# Altium PCB MFU 1.00.PcbDoc (part 1 of 2)
Units mm, origin at the board's own origin, x right, y up, seen from the top; angles counter-clockwise.
Board outline 134 x 96 mm, 2 copper layers (Top Layer, Bottom Layer), stack 1.6 mm thick; 195 components, 155 nets, 750 pads, 199 vias.
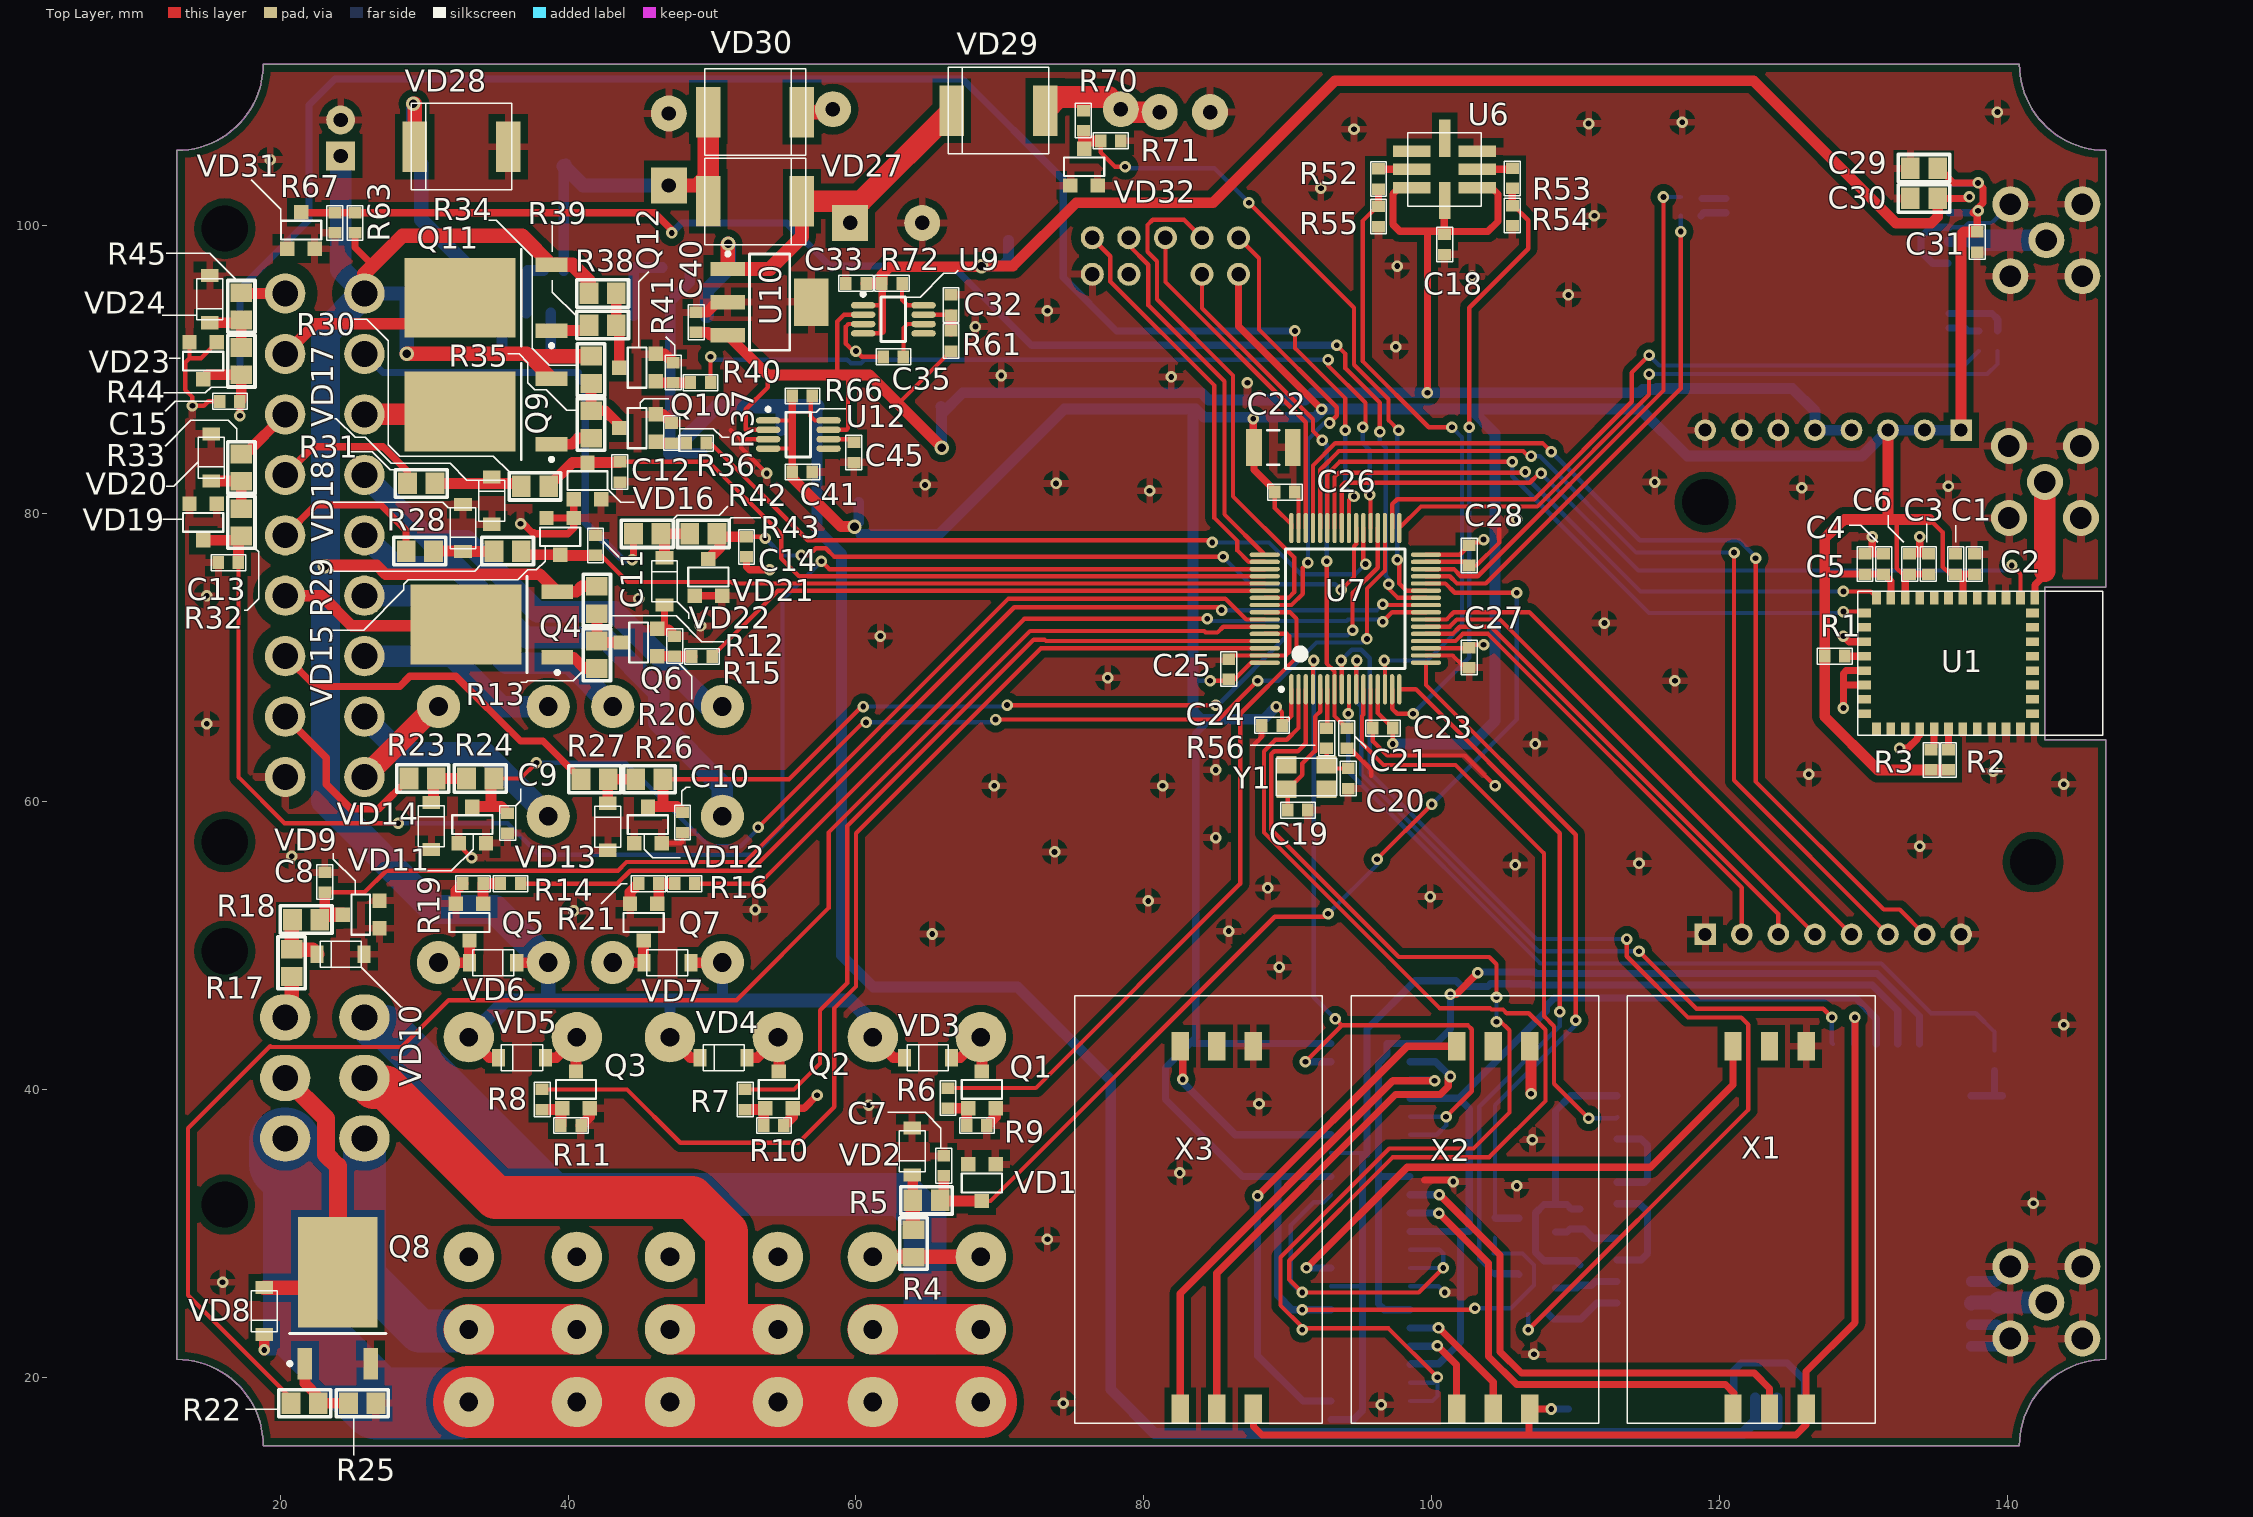
[diagram p0: Top Layer view]
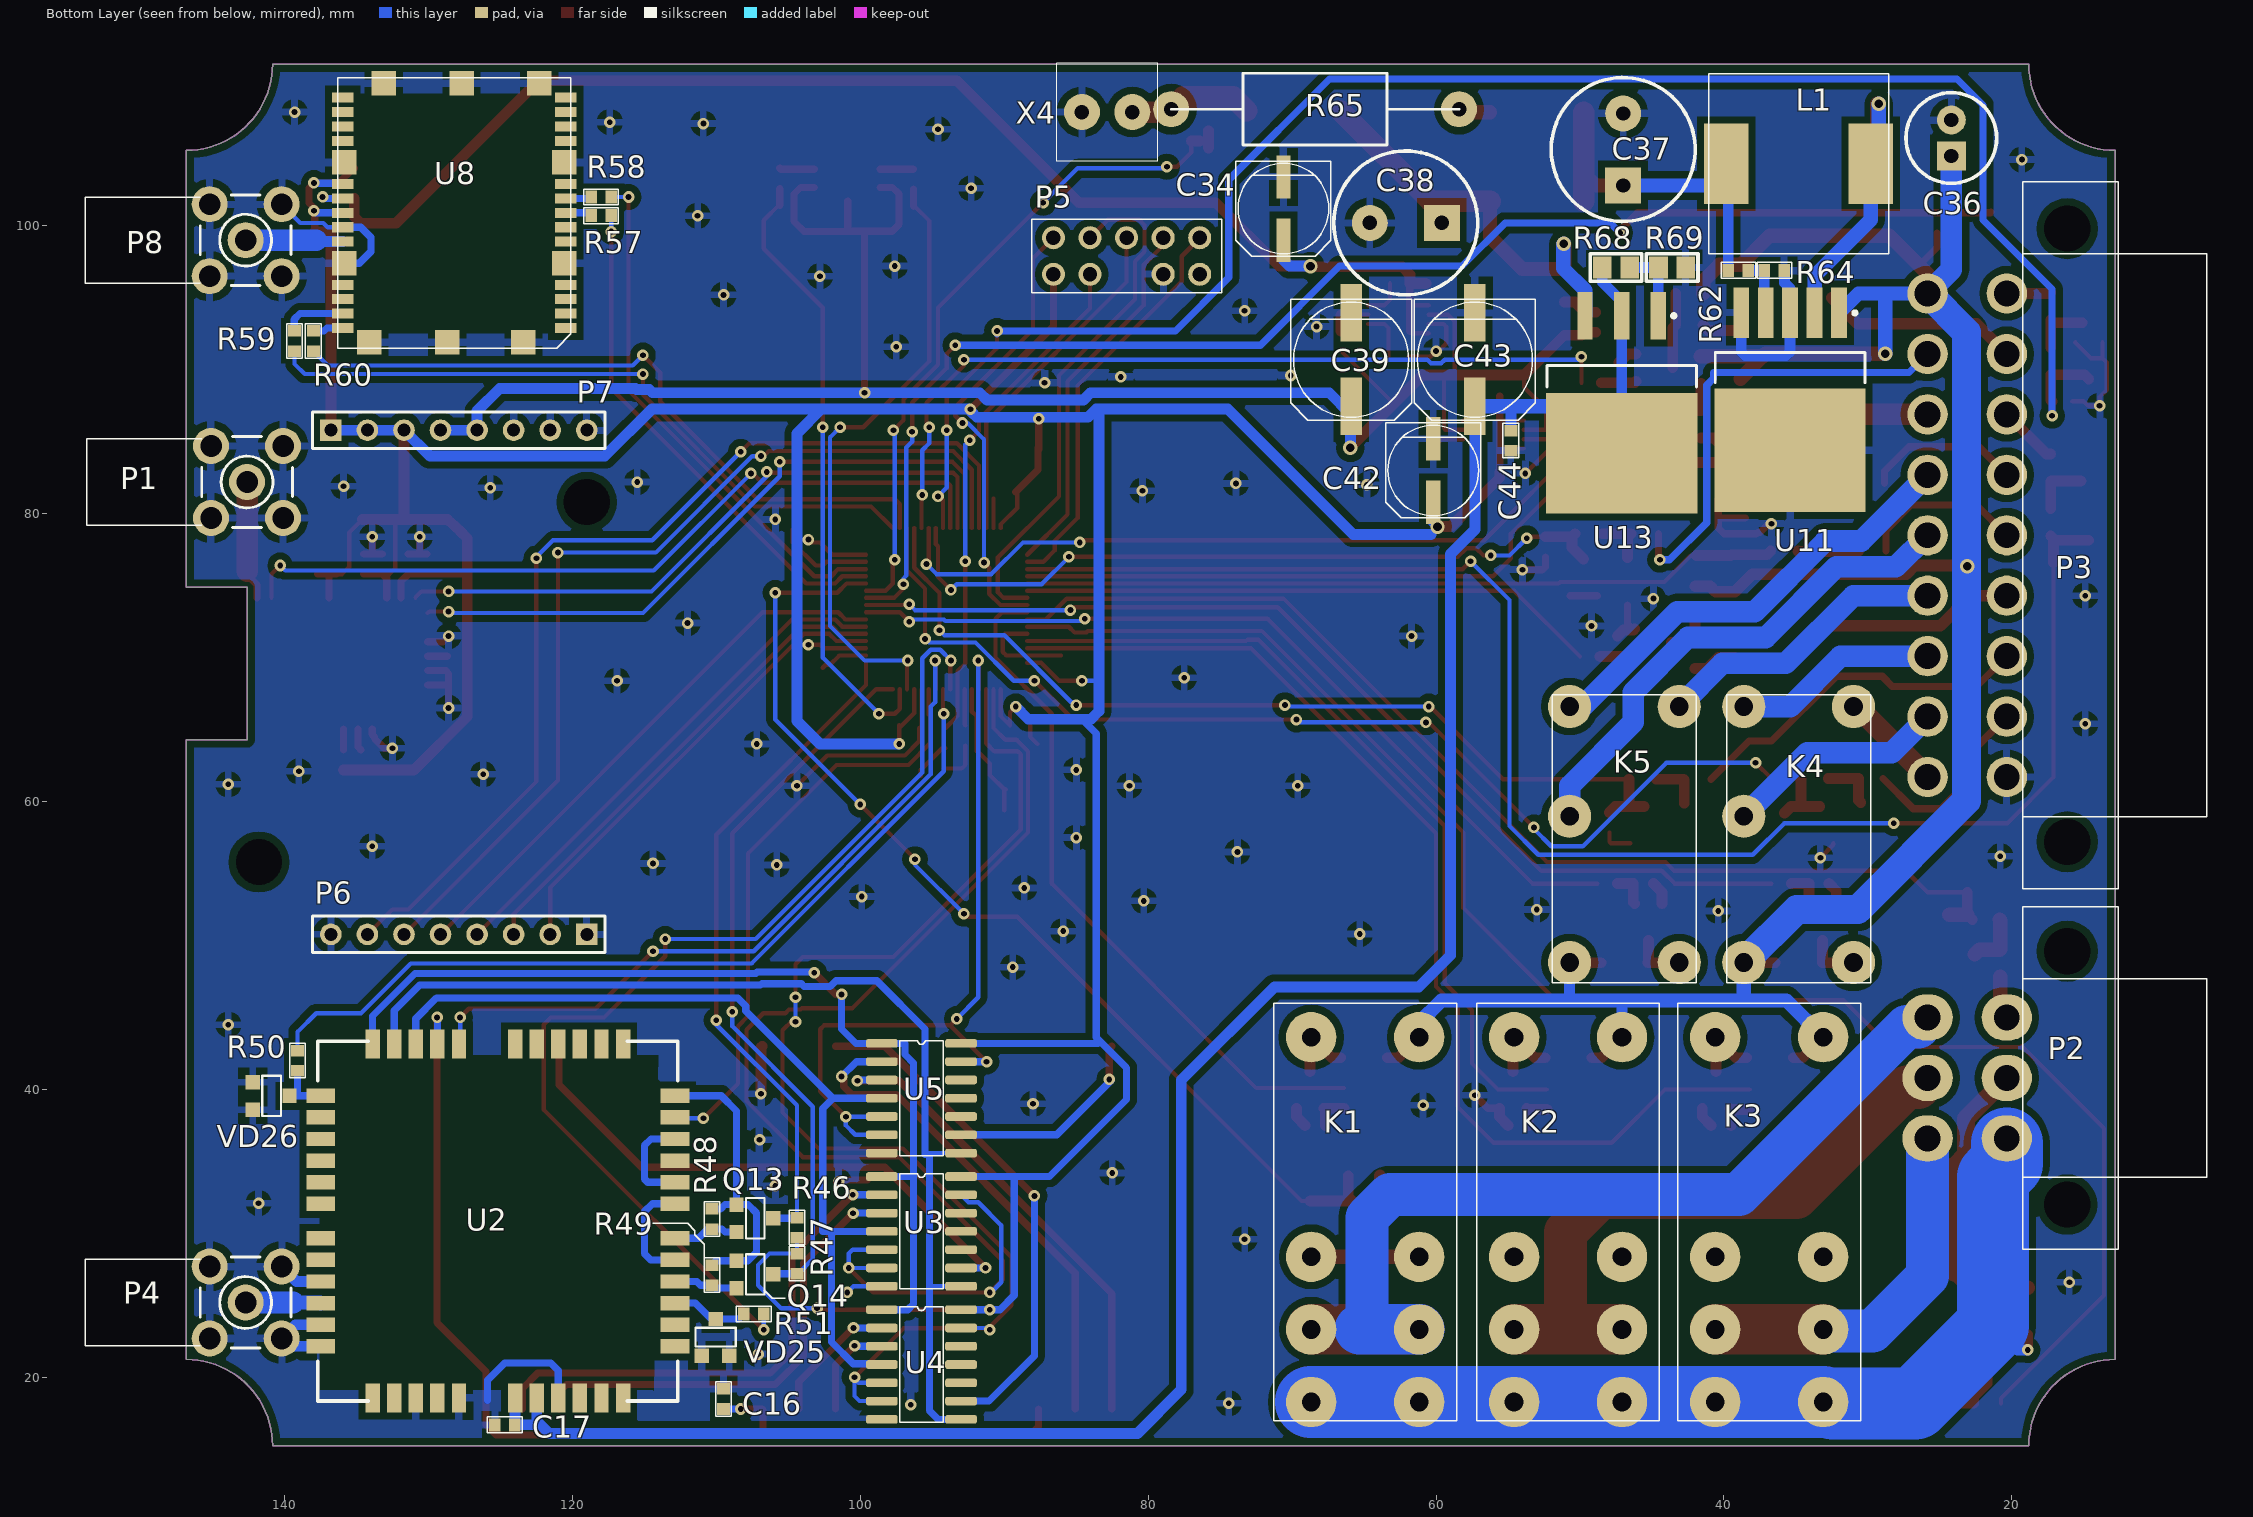
[diagram p1: Bottom Layer view, seen from below]

## Layer stack, top to bottom
Top Layer: signal copper 0.05
Dielectric: core 1.5, FR-4, Dk 4.8
Bottom Layer: signal copper 0.05

## Board outline
12.827,21.24 12.827,105.24 ccw(c12.827,111.24) 18.827,111.24 140.827,111.24 ccw(c146.827,111.24) 146.827,105.24 146.827,74.9 142.6,74.9 142.6,64.3 146.827,64.3 146.827,21.24 ccw(c146.827,15.24) 140.827,15.24 18.827,15.24 ccw(c12.827,15.24)

## Design rules (kind name [scope] priority, off if disabled: settings)
Clearance Clearance_GND [InPolygon] p1: gap=0.5
Clearance Clearance_QFP_NET [InRegion(3140,2260 ,4450 ,3400)] p2: gap=0.2
Clearance Clearance_QFP_Pins [InComponent('U12','U7','U9','U8') And IsPad] p3: gap=0.2
Clearance [All] p4: gap=0.3
ComponentClearance ComponentClearance_R1_C10 [InComponent('C10') vs InComponent('R1')] p1 off: gap=0 collisioncheckmode=3 verticalgap=0 showdistances=FALSE
ComponentClearance [All] p2 off: gap=0.3 collisioncheckmode=3 verticalgap=0.3 showdistances=FALSE
Height [All] p1 off: minheight=0 maxheight=25.4 prefheight=12.7
HoleSize [All] p1: absolutevalues=TRUE maxlimit=5 minlimit=0.3 maxpercent=80.000 minpercent=20.000
MinimumSolderMaskSliver [All] p1: minsoldermaskwidth=0.2
NetAntennae [All] p1: netantennaetolerance=50
PlaneConnect [All] p1: planeconnectstyle=Relief reliefexpansion=0.508 reliefentries=4 reliefconductorwidth=0.3 reliefairgap=0.3
PolygonConnect [All] p1: connectstyle=Relief reliefconductorwidth=0.5 reliefentries=4 polygonreliefangle="90 Angle"
RoomDefinition BLUETOOTH_UNIT [InComponentClass('BLUETOOTH_UNIT')] p1: confinementstyle=ConfineIn formatcopy=TRUE lockcomponents=FALSE outline 126.2,60.3 154.1,60.3 154.1,86.3 126.2,86.3
RoomDefinition GSM_UNIT [InComponentClass('GSM_UNIT')] p2: confinementstyle=ConfineIn formatcopy=TRUE lockcomponents=FALSE outline 74.9,15.3 154.1,15.3 154.1,46.9 74.9,47
RoomDefinition POWER_UNIT [InComponentClass('POWER_UNIT')] p3: confinementstyle=ConfineIn formatcopy=TRUE lockcomponents=FALSE outline 27.6,97.1 27.6,79.1 63.8,79.1 63.8,84.6 70.6,84.6 70.6,96.9 74.4,96.9 74.4,101.1 86.4,101.1 86.4,111.4 19.3,111.4 19.3,97.1
RoomDefinition "CAR ALARM_UNIT" [InComponentClass('CAR ALARM_UNIT')] p4: confinementstyle=ConfineIn formatcopy=TRUE lockcomponents=FALSE outline 5,15.3 71.7,15.3 71.7,47.7 54.3,47.7 54.3,103.5 5,103.5
RoomDefinition NAVIGATION_UNIT [InComponentClass('NAVIGATION_UNIT')] p5: confinementstyle=ConfineIn formatcopy=TRUE lockcomponents=FALSE outline 114.9,89.5 154.4,89.5 154.4,111.1 114.9,111.1
RoomDefinition "MFU 1.00" [InComponentClass('MFU 1.00')] p6: confinementstyle=ConfineIn formatcopy=TRUE lockcomponents=FALSE outline 74.6,49.3 138.3,49.3 138.3,109.9 74.6,109.9
RoutingCorners [All] p1: cornerstyle=45-Degree minsetback=2.54 maxsetback=5
RoutingVias [All] p1: holewidth=0.4 width=0.8 viastyle="Through Hole" minholewidth=0.3 minwidth=0.5 maxholewidth=1 maxwidth=2
ShortCircuit ShortCircuit_ANT1 [InComponent('ANT1')] p1: allowed=TRUE
ShortCircuit [All] p2: allowed=FALSE
SilkToSilkClearance [All] p1: silktosilkclearance=0.3
SilkscreenOverComponentPads [All] p1: minsilkscreentomaskgap=0.2
SolderMaskExpansion [All] p1: expansion=0.102
Width [All] p1: maxlimit=12 minlimit=0.2 preferedwidth=0.3
18 further rules are at their usual default settings.

## Classes and differential pairs
component class POWER_UNIT: C32 C33 C34 C35 C36 C37 C38 C39 C40 C41 C42 C43 C44 C45 L1 R61 R62 R63 R64 R65 R66 R67 R68 R69 R70 R71 R72 U9 U10 U11 U12 U13 VD27 VD28 VD29 VD30 VD31 VD32 X4
component class NAVIGATION_UNIT: C29 C30 C31 P8 R57 R58 R59 R60 U8
component class "MFU 1.00": C18 C19 C20 C21 C22 C23 C24 C25 C26 C27 C28 P5 P6 P7 R52 R53 R54 R55 R56 U6 U7 Y1
component class GSM_UNIT: C16 C17 P4 Q13 Q14 R46 R47 R48 R49 R50 R51 U2 U3 U4 U5 VD25 VD26 X1 X2 X3
component class "CAR ALARM_UNIT": C7 C8 C9 C10 C11 C12 C13 C14 C15 K1 K2 K3 K4 K5 P2 P3 Q1 Q2 Q3 Q4 Q5 Q6 Q7 Q8 Q9 Q10 Q11 Q12 R4 R5 R6 R7 R8 R9 R10 R11 R12 R13 R14 R15 R16 R17 R18 R19 R20 R21 R22 R23 R24 R25 R26 R27 R28 R29 R30 R31 R32 R33 R34 R35 R36 R37 R38 R39 R40 R41 R42 R43 R44 R45 VD1 VD2 VD3 VD4 VD5 VD6 VD7 VD8 VD9 VD10 VD11 VD12 VD13 VD14 VD15 VD16 VD17 VD18 VD19 VD20 VD21 VD22 VD23 VD24
component class BLUETOOTH_UNIT: C1 C2 C3 C4 C5 C6 P1 R1 R2 R3 U1

## Components (designator, comment, footprint, x,y, rotation, side; value= is the part's Value field where it differs from the comment)
C1 "0805" C0603 136.4,76.5 r90 top
C2 "0805" C0603 137.7,76.5 r90 top
C3 "0805" C0603 134.5,76.5 r90 top
C4 "0805" C0603 131.4,76.5 r90 top
C5 "0805" C0603 130.1,76.5 r90 top
C6 "0805" C0603 133.2,76.5 r90 top
C7 "0805" C0603 66.1,34.7 r90 top
C8 "0805" C0603 23.1,54.4 r90 top
C9 "0805" C0603 35.8,58.5 r270 top
C10 "0805" C0603 47.95,58.55 r270 top
C11 "0805" C0603 41.9,77.8 r90 top
C12 "0805" C0603 43.6,82.9 r270 top
C13 "0805" C0603 16.4,76.6 r180 top
C14 "0805" C0603 52.4,77.7 r270 top
C15 "0805" C0603 16.5,87.8 r180 top
C16 "0805" C0603 109.5,18.5 r270 bottom
C17 "0805" C0603 124.7,16.7 r0 bottom
C18 "0805" C0603 100.9,98.7 r90 top
C19 "0805" C0603 90.7,59.4 r0 top
C20 "0805" C0603 94.2,61.6 r270 top
C21 "0805" C0603 94.1,64.4 r90 top
C22 "Cap Semi" C1210 89,84.6 r180 top
C23 "0805" C0603 96.6,65.1 r0 top
C24 "0805" C0603 88.9,65.3 r0 top
C25 "0805" C0603 85.9,69.2 r270 top
C26 "0805" C0603 89.8,81.5 r180 top
C27 "0805" C0603 102.6,70 r90 top
C28 "0805" C0603 102.6,77.1 r90 top
C29 "0805" C0805 134.2,104 r180 top
C30 "0805" C0805 134.2,101.9 r180 top
C31 "0805" C0603 137.9,98.875 r270 top
C32 "0805" C0603 66.6,94.5 r90 top
C33 "0805" C0603 60,96 r180 top
C34 "SMD_cap" "CAPASITOR_POL_SMD D6.3" 70.6,101.2 r0 bottom
C35 "0805" C0603 62.6,90.9 r180 top
C36 "K50-35" CAP_POL_D6.3 24.2,106.1 r90 bottom
C37 "K50-35" CAP_POL_D10 47,105.3 r90 bottom
C38 "K50-35" CAP_POL_D10 62.1,100.2 r0 bottom
C39 "SMD_cap" "CAPASITOR_POL_SMD D8" 65.9,90.7 r0 bottom
C40 "0805" C0603 48.9,93.3 r90 top
C41 "0805" C0603 56.275,82.9 r0 top
C42 "SMD_cap" "CAPASITOR_POL_SMD D6.3" 60.2,83 r0 bottom
C43 "SMD_cap" "CAPASITOR_POL_SMD D8" 57.3,90.7 r0 bottom
C44 "0805" C0603 54.8,85.075 r270 bottom
C45 "0805" C0603 59.85,84.25 r270 top
K1 "RT314012" RT314012 68.675,43.63 r270 bottom
K2 "RT314012" RT314012 54.578,43.63 r270 bottom
K3 "RT314012" RT314012 40.608,43.63 r270 bottom
K4 "PE014012" PE014012 31,48.82 r90 bottom
K5 "PE014012" PE014012 43.1,48.82 r90 bottom
L1 "B82477P4" INDUCTOR_SMD_12.5X12.5 34.8,104.3 r0 bottom
P1 "SMA" SMA 142.6,82.2 r0 bottom
P2 "MF 2x3MR" "MF 2X3MR" 23.1,40.8 r90 bottom
P3 "MF 2x9MR" "MF 2X9MR" 23.1,78.5 r90 bottom
P4 "SMA" SMA 142.7,25.2 r0 bottom
P5 "JTAG_PORT" JTAG_CONNECTOR 81.5,97.9 r90 bottom
P6 "Header 8" HDR1X8 119,50.775 r0 bottom
P7 "Header 8" HDR1X8 136.78,85.8 r180 bottom
P8 "SMA" SMA 142.7,99 r0 bottom
Q1 "BSS138" SOT23 67.8,38.7 r0 top
Q2 "BSS138" SOT23 53.7,38.7 r0 top
Q3 "BSS138" SOT23 39.6,38.7 r0 top
Q4 "IRFR9024" TO-252AA_M 34.7,72.3 r180 top
Q5 "BSS138" SOT23 34.1,52.9 r180 top
Q6 "BSS138" SOT23 46.2,70.1 r90 top
Q7 "BSS138" SOT23 46.2,52.9 r180 top
Q8 "IRLR024N" TO-252AA_M 24,25.5 r90 top
Q9 "IRFR9024" TO-252AA_M 34.3,87.1 r180 top
Q10 "BSS138" SOT23 46.1,85 r90 top
Q11 "IRFR9024" TO-252AA_M 34.3,95 r180 top
Q12 "BSS138" SOT23 46.1,89.2 r90 top
Q13 "BSS138" SOT23 108.6,32 r270 bottom
Q14 "BSS138" SOT23 108.6,28.1 r270 bottom
R1 "RES" C0603 128,70.1 r180 top
R2 "RES" C0603 135.9,62.9 r270 top
R3 "RES" C0603 134.7,62.9 r270 top
R4 "RES" C0805 64,29.3 r90 top
R5 "RES" C0805 64.9,32.3 r0 top
R6 "RES" C0603 66.4,39.4 r90 top
R7 "RES" C0603 52.3,39.3 r90 top
R8 "RES" C0603 38.2,39.3 r90 top
R9 "RES" C0603 68.4,37.5 r180 top
R10 "RES" C0603 54.3,37.5 r180 top
R11 "RES" C0603 40.2,37.5 r180 top
R12 "RES" C0805 42,74 r90 top
R13 "RES" C0805 42,70.2 r90 top
R14 "RES" C0603 36,54.3 r0 top
R15 "RES" C0603 49.3,70.075 r0 top
R16 "RES" C0603 48.1,54.3 r0 top
R17 "RES" C0805 20.8,48.8 r90 top
R18 "RES" C0805 21.8,51.8 r0 top
R19 "RES" C0603 33.4,54.3 r0 top
R20 "RES" C0603 47.4,70.8 r270 top
R21 "RES" C0603 45.6,54.3 r0 top
R22 "RES" C0805 21.7,18.2 r180 top
R23 "RES" C0805 29.9,61.6 r0 top
R24 "RES" C0805 33.9,61.6 r0 top
R25 "RES" C0805 25.7,18.2 r180 top
R26 "RES" C0805 45.65,61.55 r0 top
R27 "RES" C0805 41.85,61.55 r0 top
R28 "RES" C0805 29.7,77.4 r0 top
R29 "RES" C0805 35.8,77.4 r0 top
R30 "RES" C0805 37.7,81.9 r0 top
R31 "RES" C0805 29.8,82.1 r0 top
R32 "RES" C0805 17.3,79.4 r270 top
R33 "RES" C0805 17.3,83.2 r270 top
R34 "RES" C0805 41.6,90 r90 top
R35 "RES" C0805 41.6,86.2 r90 top
R36 "RES" C0603 48.9,84.9 r0 top
R37 "RES" C0603 47.2,85.6 r270 top
R38 "RES" C0805 42.4,95.3 r180 top
R39 "RES" C0805 42.4,93.1 r0 top
R40 "RES" C0603 49.2,89.1 r0 top
R41 "RES" C0603 47.3,89.8 r270 top
R42 "RES" C0805 45.5,78.6 r0 top
R43 "RES" C0805 49.4,78.6 r0 top
R44 "RES" C0805 17.3,90.6 r270 top
R45 "RES" C0805 17.3,94.4 r270 top
R46 "RES" C0603 104.4,30.4 r90 bottom
R47 "RES" C0603 104.4,27.9 r270 bottom
R48 "RES" C0603 110.3,31 r270 bottom
R49 "RES" C0603 110.3,27.1 r270 bottom
R50 "RES" C0603 139.1,42 r270 bottom
R51 "RES" C0603 107.4,24.4 r0 bottom
R52 "RES" C0603 96.3,103.25 r90 top
R53 "RES" C0603 105.6,103.3 r90 top
R54 "RES" C0603 105.6,100.7 r270 top
R55 "RES" C0603 96.3,100.65 r270 top
R56 "RES" C0603 92.7,64.4 r90 top
R57 "RES" C0603 118,100.7 r0 bottom
R58 "RES" C0603 118,102 r0 bottom
R59 "RES" C0603 139.3,92 r90 bottom
R60 "RES" C0603 138,92 r90 bottom
R61 "RES" C0603 66.6,92 r270 top
R62 "RES" C0603 39,96.9 r0 bottom
R63 "RES" C0603 25.2,100.2 r270 top
R64 "RES" C0603 36.5,96.9 r0 bottom
R65 "KNP-200" "RESISTOR KNP-200" 78.4,108.1 r180 bottom
R66 "RES" C0603 56.275,88.175 r180 top
R67 "RES" C0603 23.8,100.2 r90 top
R68 "RES" C0805 47.5,97.1 r0 bottom
R69 "RES" C0805 43.6,97.1 r0 bottom
R70 "RES" C0603 75.8,107.3 r90 top
R71 "RES" C0603 77.7,105.9 r180 top
R72 "RES" C0603 62.5,96 r180 top
U1 "LMX9838" LMX9838 135.9,69.6 r270 top
U2 "WISMO 228" WISMO 116.5,43.2 r270 bottom
U3 "74HC4066" SO-14 98.5,33.95 r180 bottom
U4 "74HC4066" SO-14 98.5,24.7 r180 bottom
U5 "74HC4066" SO-14 98.5,43.2 r180 bottom
U6 "ADXL278" ADXL278 100.9,103.925 r180 top
U7 "STM32F103RET6" LQFP64_M 94,73.4 r90 top
U8 "Fastrex IT600" FASTREX_IT600 120.1,91.5 r90 bottom
U9 "LP3982IMM-1.8" MUA08A_N 62.6,93.5 r0 top
U10 "LM2937IMP-5.0" MP04A_N 54,94.7 r0 top
U11 "LM2576S-ADJ" TO-263-5 35.4,87.9 r270 bottom
U12 "LP3982IMM-3.3" MUA08A_N 56,85.5 r0 top
U13 "LM1086IS-ADJ/NOPB" TS3B_N 47.1,87.7 r270 bottom
VD1 "BZX84C3V3" SOT23 69.7,34.8 r180 top
VD2 "MBR054" SOD-123 63.9,35.7 r90 top
VD3 "MBR054" SOD-123 65,42.2 r0 top
VD4 "MBR054" SOD-123 50.8,42.2 r0 top
VD5 "MBR054" SOD-123 36.8,42.2 r0 top
VD6 "MBR054" SOD-123 34.8,48.8 r180 top
VD7 "MBR054" SOD-123 46.9,48.8 r180 top
VD8 "MBR054" SOD-123 18.9,24.6 r90 top
VD9 "BZX84C3V3" SOT23 26.9,51.2 r90 top
VD10 "MBR054" SOD-123 24.2,49.4 r0 top
VD11 "BZX84C3V3" SOT23 32.4,57.1 r0 top
VD12 "BZX84C3V3" SOT23 44.6,57.1 r0 top
VD13 "MBR054" SOD-123 42.75,58.25 r270 top
VD14 "MBR054" SOD-123 30.5,58.3 r270 top
VD15 "BZX84C3V3" SOT23 40.4,79.7 r180 top
VD16 "BZX84C3V3" SOT23 40.4,81 r0 top
VD17 "MBR054" SOD-123 34.7,80.9 r270 top
VD18 "MBR054" SOD-123 32.7,79 r90 top
VD19 "BZX84C3V3" SOT23 15.6,80.7 r180 top
VD20 "MBR054" SOD-123 15.2,83.9 r90 top
VD21 "BZX84C3V3" SOT23 48.8,74.3 r0 top
VD22 "MBR054" SOD-123 46.7,75.3 r270 top
VD23 "BZX84C3V3" SOT23 15.6,91.9 r180 top
VD24 "MBR054" SOD-123 15.1,94.9 r90 top
VD25 "BZX84C2V7" SOT23 111,21.5 r180 bottom
VD26 "BZX84C2V7" SOT23 142.2,40.5 r270 bottom
VD27 "SK32" SMC 53,101.7 r180 top
VD28 "SK32" SMC 32.6,105.5 r0 top
VD29 "SK32" SMC 69.9,108 r0 top
VD30 "SK32" SMC 53,107.9 r180 top
VD31 "BZX84C3V3" SOT23 20.5,98.4 r0 top
VD32 "BZX84C3V3" SOT23 74.9,102.8 r0 top
X1 "SCV-W2523X30-06-LF" SCV-W2523X30-06-LF 122.2,30.4 r90 top
X2 "SCV-W2523X30-06-LF" SCV-W2523X30-06-LF 103,30.4 r90 top
X3 "SCV-W2523X30-06-LF" SCV-W2523X30-06-LF 83.8,30.4 r90 top
X4 "DG350-3.5-2P" DG350-3.5-2P 81.1,107.9 r0 bottom
Y1 "SMD0425" QUARTZ_SMD0425 91.3,61.7 r180 top

## Footprints (in the part's own frame and the unit in brackets; to place one, negate y for a bottom-side part, rotate by r counter-clockwise, add the part's x,y. Pads: shape width x height; smd on the part's side, far side on the other; paste and mask are expansions set on the pad)
ADXL278 [mm] "Accelerometr"
  rect 2.6x0.8 smd mask+0.2: 1(-2.275,1.27) 2(-2.275,0) 3(-2.275,-1.27) 5(2.275,-1.27) 6(2.275,0) 7(2.275,1.27)
  rect 0.8x2.6 smd mask+0.2: 4(0,-2.17) 8(0,2.17)
  silkscreen extent -2.55,-2.55 2.55,2.55
C0603 [mm]
  rect 0.8x0.9 smd mask+0.2: 1(-0.7,0) 2(0.7,0)
  silkscreen extent -1.2,-0.55 1.2,0.55, body extent -0.87,-0.48 0.87,0.48, height 1.3
C0805 [mm]
  rect 1.3x1.5 smd mask+0.2: 1(-0.95,0) 2(0.95,0)
  silkscreen extent -1.8,-0.95 1.8,0.95
C1210 [mm] "Chip Capacitor, Body 3.2x2.5mm, IPC High Density"
  rect 1.1x2.6 smd mask+0.2: 1(-1.35,0) 2(1.35,0)
  silkscreen extent -0.4,-1.2 0.4,1.2, body extent -1.7,-1.35 1.7,1.35, height 1.3
CAP_POL_D6.3 [mm]
  rect 2x2 hole 1 mask+0.2: 1(-1.25,0)
  round 2 hole 1 mask+0.2: 2(1.25,0)
  silkscreen extent -3.15,-3.15 3.15,3.15, body extent -3.13,-3.14 3.15,3.14, height 11
CAP_POL_D10 [mm]
  rect 2.5x2.5 hole 1 mask+0.2: 1(-2.5,0)
  round 2.5 hole 1 mask+0.2: 2(2.5,0)
  silkscreen extent -5,-5 5,5, body extent -4.96,-4.99 5,4.99, height 20
"CAPASITOR_POL_SMD D6.3" [mm]
  rect 1x3 smd mask+0.2: 1(0,2.2) 2(0,-2.2)
  silkscreen extent -3.3,-3.3 3.3,3.3
"CAPASITOR_POL_SMD D8" [mm]
  rect 1.5x4 smd mask+0.2: 1(0,3.25) 2(0,-3.25)
  silkscreen extent -4.2,-4.2 4.2,4.2
DG350-3.5-2P [mm]
  round 2.5 hole 1 mask+0.2: 1(0,0) 2(3.5,0)
  silkscreen extent -1.75,-3.4 5.25,3.4
FASTREX_IT600 [mm] "GPS/ГЛОНАСС"
  rect 0.7x1.5 smd mask+0.2: 1(1.4,0.35) 2(2.4,0.35) 3(3.4,0.35) 4(4.4,0.35) 6(7.4,0.35) 7(8.4,0.35) 8(9.4,0.35) 9(10.4,0.35) 10(11.4,0.35) 12(14.4,0.35) 13(15.4,0.35) 14(16.4,0.35) 15(17.4,0.35) 16(17.4,15.85) 17(16.4,15.85) 18(15.4,15.85) 19(14.4,15.85) 21(11.4,15.85) 22(10.4,15.85) 23(9.4,15.85) 24(8.4,15.85) 25(7.4,15.85) 27(4.4,15.85) 28(3.4,15.85) 29(2.4,15.85) 30(1.4,15.85)
  rect 1.7x1.7 smd mask+0.2: 5(5.9,0.45) 11(12.9,0.45) 20(12.9,15.75) 26(5.9,15.75) 31(18.4,2.2) 32(18.4,7.6) 33(18.4,13) 34(0.4,14) 35(0.4,8.6) 36(0.4,3.3)
  silkscreen extent 0,0 18.8,16.2
HDR1X8 [mm] "Connector; Header; 8 Position"
  rect 1.5x1.5 hole 0.9 mask+0.2: 1(0,0)
  round 1.5 hole 0.9 mask+0.2: 2(2.54,0) 3(5.08,0) 4(7.62,0) 5(10.16,0) 6(12.7,0) 7(15.24,0) 8(17.78,0)
  silkscreen extent -1.27,-1.27 19.05,1.27
INDUCTOR_SMD_12.5X12.5 [mm]
  rect 3.1x5.6 smd mask+0.2: 1(-5,0) 2(5.05,0)
  silkscreen extent -6.25,-6.25 6.25,6.25
JTAG_CONNECTOR [mm]
  round 1.6 hole 1 mask+0.2: 1(-1.27,5.08) 2(1.27,5.08) 3(-1.27,2.54) 4(1.27,2.54) 6(1.27,0) 7(-1.27,-2.54) 8(1.27,-2.54) 9(-1.27,-5.08) 10(1.27,-5.08)
  silkscreen extent -2.54,-6.6 2.54,6.6
LMX9838 [mm] "Bluetooth_OEM_module"
  rect 0.9x0.6 smd mask+0.2: 1(-4.55,6) 2(-4.55,5) 3(-4.55,4) 4(-4.55,3) 5(-4.55,2) 6(-4.55,1) 7(-4.55,0) 8(-4.55,-1) 9(-4.55,-2) 10(-4.55,-3) 11(-4.55,-4) 12(-4.55,-5) 21(4.55,-5) 22(4.55,-4) 23(4.55,-3) 24(4.55,-2) 25(4.55,-1) 26(4.55,0) 27(4.55,1) 28(4.55,2) 29(4.55,3) 30(4.55,4) 31(4.55,5) 32(4.55,6)
  round 0.2 on Top Overlay mask+0.2: 1(-4.5,10.2)
  rect 0.6x0.9 smd mask+0.2: 13(-3.5,-5.85) 14(-2.5,-5.85) 15(-1.5,-5.85) 16(-0.5,-5.85) 17(0.5,-5.85) 18(1.5,-5.85) 19(2.5,-5.85) 20(3.5,-5.85) 33(3.5,5.85) 34(2.5,5.85) 35(1.5,5.85) 36(0.5,5.85) 37(-0.5,5.85) 38(-1.5,5.85) 39(-2.5,5.85) 40(-3.5,5.85)
  silkscreen extent -5,-6.3 5,10.7
LQFP64_M [mm] "Thin QFP, 64-Leads, Body 10x10mm, Pitch 0.5mm, IPC Low Density"
  oval 2.1x0.3 smd mask+0.2: 1(-5.6,3.75) 2(-5.6,3.25) 3(-5.6,2.75) 4(-5.6,2.25) 5(-5.6,1.75) 6(-5.6,1.25) 7(-5.6,0.75) 8(-5.6,0.25) 9(-5.6,-0.25) 10(-5.6,-0.75) 11(-5.6,-1.25) 12(-5.6,-1.75) 13(-5.6,-2.25) 14(-5.6,-2.75) 15(-5.6,-3.25) 16(-5.6,-3.75) 33(5.6,-3.75) 34(5.6,-3.25) 35(5.6,-2.75) 36(5.6,-2.25) 37(5.6,-1.75) 38(5.6,-1.25) 39(5.6,-0.75) 40(5.6,-0.25) 41(5.6,0.25) 42(5.6,0.75) 43(5.6,1.25) 44(5.6,1.75) 45(5.6,2.25) 46(5.6,2.75) 47(5.6,3.25) 48(5.6,3.75)
  oval 0.3x2.1 smd mask+0.2: 17(-3.75,-5.6) 18(-3.25,-5.6) 19(-2.75,-5.6) 20(-2.25,-5.6) 21(-1.75,-5.6) 22(-1.25,-5.6) 23(-0.75,-5.6) 24(-0.25,-5.6) 25(0.25,-5.6) 26(0.75,-5.6) 27(1.25,-5.6) 28(1.75,-5.6) 29(2.25,-5.6) 30(2.75,-5.6) 31(3.25,-5.6) 32(3.75,-5.6) 49(3.75,5.6) 50(3.25,5.6) 51(2.75,5.6) 52(2.25,5.6) 53(1.75,5.6) 54(1.25,5.6) 55(0.75,5.6) 56(0.25,5.6) 57(-0.25,5.6) 58(-0.75,5.6) 59(-1.25,5.6) 60(-1.75,5.6) 61(-2.25,5.6) 62(-2.75,5.6) 63(-3.25,5.6) 64(-3.75,5.6)
  silkscreen extent -5.72,-4.15 4.15,4.57, body extent -5,-5 5,5, height 1.6
"MF 2X3MR" [mm]
  round 0 hole 3.2 unplated mask+0.2: 0(-8.8,-6.95) 0(8.8,-6.95)
  oval 3.2x3.5 hole 1.8 mask+0.2: 1(-4.2,-2.75) 2(-4.2,2.75) 3(0,-2.75) 4(0,2.75) 5(4.2,-2.75) 6(4.2,2.75)
  silkscreen extent -11.9,-16.65 11.9,-3.85
"MF 2X9MR" [mm]
  round 0 hole 3.2 unplated mask+0.2: 0(-21.3,-6.95) 0(21.3,-6.95)
  round 2.8 hole 1.8 mask+0.2: 1(-16.8,-2.75) 2(-16.8,2.75) 3(-12.6,-2.75) 4(-12.6,2.75) 5(-8.4,-2.75) 6(-8.4,2.75) 7(-4.2,-2.75) 8(-4.2,2.75) 9(0,-2.75) 10(0,2.75) 11(4.2,-2.75) 12(4.2,2.75) 13(8.4,-2.75) 14(8.4,2.75) 15(12.6,-2.75) 16(12.6,2.75) 17(16.8,-2.75) 18(16.8,2.75)
  silkscreen extent -24.55,-16.65 24.55,-3.85
MP04A_N [mm] "SOT223, 4-Leads, Body 6.5x3.5mm, Pitch 2.3mm, Lead Span 7mm, IPC Medium Density"
  rect 2.4x1 smd mask+0.2: 1(-2.9,2.3) 2(-2.9,0) 3(-2.9,-2.3)
  rect 2.4x3.3 smd mask+0.2: 4(2.9,0)
  silkscreen extent -3.02,-3.35 1.4,3.47, body extent -1.85,-3.35 1.85,3.35, height 1.8
MUA08A_N [mm] "TSOP, 8-Leads, Body 3x3mm, Pitch 0.65mm, IPC Medium Density"
  oval 1.7x0.45 smd mask+0.2: 1(-2.1,0.975) 2(-2.1,0.325) 3(-2.1,-0.325) 4(-2.1,-0.975) 5(2.1,-0.975) 6(2.1,-0.325) 7(2.1,0.325) 8(2.1,0.975)
  silkscreen extent -2.22,-1.55 0.85,1.87, body extent -1.6,-1.6 1.6,1.6, height 1.09
PE014012 [mm]
  round 3 hole 1.3 mask+0.2: 1(0,0) 2(0,7.62) 3(10.16,7.62) 4(17.78,0) 5(17.78,7.62)
  silkscreen extent -1.4,-1.19 18.6,8.81
QUARTZ_SMD0425 [mm]
  rect 1.4x1.2 smd mask+0.2: 1(-1.4,-0.85) 2(1.4,-0.85) 3(1.4,0.85) 4(-1.4,0.85)
  silkscreen extent -2.1,-1.3 2.1,1.3
"RESISTOR KNP-200" [mm]
  round 2.5 hole 1 mask+0.2: 1(0,0) 2(20,0)
  silkscreen extent 0,-2.5 20,2.5
RT314012 [mm]
  round 3.5 hole 1.3 mask+0.2: 1(0,0) 2(0,7.5) 3(20.3,0) 3(20.3,7.5) 4(15.26,0) 4(15.26,7.5) 5(25.34,0) 5(25.34,7.5)
  silkscreen extent -2.35,-2.6 26.65,10.1
SCV-W2523X30-06-LF [mm] "SIM Cartreader"
  rect 2x1.2 smd mask+0.2: 1(-12.6,-3.81) 2(-12.6,-1.27) 3(-12.6,1.27) 4(12.6,-3.81) 5(12.6,-1.27) 6(12.6,1.27)
  silkscreen extent -13.6,-8.6 16.1,8.6
SMA [mm]
  round 2.5 hole 1.5 mask+0.2: 1(0,0) 2(-2.5,-2.5) 2(-2.5,2.5) 2(2.5,-2.5) 2(2.5,2.5)
  silkscreen extent -3.15,-3.15 11.15,3.15
SMC [mm] "Корпус SMD диода"
  rect 1.7x3.5 smd mask+0.2: 1(-3.25,0) 2(3.25,0)
  silkscreen extent -3.5,-3 3.5,3
SO-14 [mm]
  rrect50% 2.2x0.6 smd mask+0.2: 1(0,0) 2(0,-1.27) 3(0,-2.54) 4(0,-3.81) 5(0,-5.08) 6(0,-6.35) 7(0,-7.62) 8(5.5,-7.62) 9(5.5,-6.35) 10(5.5,-5.08) 11(5.5,-3.81) 12(5.5,-2.54) 13(5.5,-1.27) 14(5.5,0)
  silkscreen extent 1.25,-7.81 4.25,0.19
SOD-123 [mm]
  rect 0.91x1.22 smd mask+0.2: 1(-1.635,0) 2(1.635,0)
  silkscreen extent -1.43,-0.9 1.43,0.9
SOT23 [mm]
  rect 1x1 smd mask+0.2: 1(0,0) 2(1.9,0) 3(0.95,2.55)
  silkscreen extent -0.45,0.65 2.35,1.95
TO-252AA_M [mm] "D-PAK, 4-Leads, Body 6.1x6.5mm, Pitch 2.28mm, Lead Span 9.9mm, IPC Low Density"
  rect 2.2x1 smd mask+0.2: 1(-4.55,2.28) 3(-4.55,-2.28)
  rect 7.7x5.55 smd mask+0.2: 4(1.8,0)
  silkscreen extent -4.67,-3.35 -2.45,3.45, body extent -2.2,-3.37 4.15,3.37, height 2.38
TO-263-5 [mm]
  rect 3.5x1.1 smd mask+0.2: 1(-6.05,3.4) 2(-6.05,1.7) 3(-6.05,0) 4(-6.05,-1.7) 5(-6.05,-3.4)
  rect 8.6x10.5 smd mask+0.2: 3(3.5,0)
  silkscreen extent -6.17,-5.2 -1.2,5.2, body extent -3.3,-5.2 6.1,5.2, height 4.65
TS3B_N [mm] "D2-PAK, 4-Leads, Body 8.6x10.2mm, Pitch 2.54mm, Lead Span 14.2mm, IPC Medium Density"
  rect 3.3x1.05 smd mask+0.2: 1(-6.05,2.54) 2(-6.05,0) 3(-6.05,-2.54)
  rect 8.4x10.5 smd mask+0.2: 4(3.5,0)
  silkscreen extent -6.17,-5.2 -1.1,5.2, body extent -2.6,-5.2 6.29,5.2, height 4.64
WISMO [mm]
  rect 2x1 smd mask+0.2: 1(0.04,0.02) 2(0.04,-1.48) 3(0.04,-2.98) 4(0.04,-4.48) 5(0.04,-5.98) 6(0.04,-7.48) 7(0.04,-11.38) 8(0.04,-12.88) 9(0.04,-14.38) 10(0.04,-15.88) 11(0.04,-17.38) 24(24.64,-17.38) 25(24.64,-15.88) 26(24.64,-14.38) 27(24.64,-12.88) 28(24.64,-11.38) 29(24.64,-7.48) 30(24.64,-5.98) 31(24.64,-4.48) 32(24.64,-2.98) 33(24.64,-1.48) 34(24.64,0.02)
  rect 1x2 smd mask+0.2: 12(3.64,-20.98) 13(5.14,-20.98) 14(6.64,-20.98) 15(8.14,-20.98) 16(9.64,-20.98) 17(11.14,-20.98) 18(13.54,-20.98) 19(15.04,-20.98) 20(16.54,-20.98) 21(18.04,-20.98) 22(19.54,-20.98) 23(21.04,-20.98) 35(21.04,3.62) 36(19.54,3.62) 37(18.04,3.62) 38(16.54,3.62) 39(15.04,3.62) 40(13.54,3.62) 41(11.14,3.62) 42(9.64,3.62) 43(8.14,3.62) 44(6.64,3.62) 45(5.14,3.62) 46(3.64,3.62)
  silkscreen extent -0.16,-21.18 24.84,3.82, body extent -0.1,-21.2 24.8,3.8, height 2.8

## Part data
C1 C2 C3 C4 C5 C6 C7 C8 C9 C10 C11 C12 C13 C14 C15 C16 C17 C18 C19 C20 C21 C23 C24 C25 C26 C27 C28 C29 C30 C31 C32 C33 C35 C40 C41 C44 C45: library part Capasitor_SMD_0805, "Capasitor_SMD_0808/"
C22: "Capacitor (Semiconductor SIM Model)"
C34 C42: library part "Capasitor_POL_SMD D8.0"
C36: library part "Capasitor_pol D6.3"
C37 C38: library part "Capasitor_pol D10"
C39 C43: library part "Capasitor_POL_SMD D8.0", "size 8x10.5"
P5: library part JTAG_port
P6 P7: "Header, 8-Pin"
Q1 Q2 Q3 Q5 Q6 Q7 Q10 Q12 Q13 Q14: library part BSS138-SOT23, "BSS138-SOT23"
Q4 Q8 Q9 Q11: "HEXFET Power MOSFET"
R1 R2 R3 R4 R5 R6 R7 R8 R9 R10 R11 R12 R13 R14 R15 R16 R17 R18 R19 R20 R21 R22 R23 R24 R25 R26 R27 R28 R29 R30 R31 R32 R33 R34 R35 R36 R37 R38 R39 R40 R41 R42 R43 R44 R45 R46 R47 R48 R49 R50 R51 R52 R53 R54 R55 R56 R57 R58 R59 R60 R61 R62 R63 R64 R66 R67 R68 R69 R70 R71 R72: "Resistor"
R65: library part "Resistor 2W"
U1: "Bluetooth module"
U7: library part STM32F103RBT6, "STM32 ARM-based 32-bit MCU with 512 Kbytes Flash, 64-pin LQFP, Industrial Temperature"
U8: library part "Fastrax IT600", "GPS/ГЛОНАСС"
U9 U12: "Micropower, Ultra Low-Dropout, Low-Noise, 300mA CMOS Regulator, 8-pin Mini SOIC"
U10: "500 mA Low Dropout Regulator, 4-pin SOT-223"
U13: "1.5A Low Dropout Positive Regulators, 3-pin TO-263, Pb-Free"
VD1 VD9 VD11 VD12 VD15 VD16 VD19 VD21 VD23 VD25 VD26 VD31 VD32: library part BZX84C, "BZX84C"
X1 X2 X3: "SIM Cartreader"
Y1: library part Quartz_SMD

## Free pads (board coordinates)
  round 0 hole 3.2 unplated mask+0.2: 0(141.78,55.8) 1(119,80.8)

## Via types
v1: diameter 0.8, hole 0.4, Top Layer to Bottom Layer, tented both sides, 192 vias
v2: diameter 1, hole 0.6, Top Layer to Bottom Layer, tented both sides, 7 vias

## Nets (pads, with @x,y where several pads share a name; then routed paths per layer and width w, separated by ;. In a path a pad name is that pad's centre, name@x,y a point inside that pad or via, vN(x,y) a via of type N, cw(c..) or ccw(c..) an arc to the next point about the centre after c; other vN are vias at no path point)
ACC: K3.3 P2.2 | length 25.2
  Top Layer w3.5: K3.3@33.108,23.33 K3.3@40.608,23.33
  Bottom Layer w3: P2.2@25.85,36.6 25.85,27.05 29.67,23.23 K3.3@32.408,23.23
BRAKE_CTRL: P3.5 R27.1 | length 24.7
  Top Layer w0.5: P3.5@20.35,70.1 22.45,68 28.3,68 29,68.7 32.2,68.7 36.7,64.2 38.25,64.2 R27.1@40.9,61.55
DC_COM: K4.3 P3.4 | length 15.6
  Bottom Layer w1.5: P3.4@25.85,65.9 28.35,63.4 34.2,63.4 K4.3@38.62,58.98
DC_NC: K4.4 P3.2 | length 7.2
  Top Layer w1.5: P3.2@25.85,61.7 30.75,66.6 K4.4@31,66.6
DC_NO: K4.5 P3.6 | length 14.2
  Bottom Layer w1.5: P3.6@25.85,70.1 31.9,70.1 35.4,66.6 K4.5@38.62,66.6
DO_COM: K5.3 P3.10 | length 35.4
  Bottom Layer w1.5: P3.10@25.85,78.5 28.05,76.3 32.2,76.3 37.1,71.4 42.5,71.4 46.3,67.6 46.3,65.5 50.72,61.08 K5.3@50.72,58.98
DO_NC: K5.4 P3.8 | length 20.4
  Bottom Layer w1.5: P3.8@25.85,74.3 31,74.3 35.7,69.6 40.1,69.6 K5.4@43.1,66.6
DO_NO: K5.5 P3.12 | length 31.5
  Bottom Layer w1.5: P3.12@25.85,82.7 30.45,78.1 32.946,78.1 37.846,73.2 43.246,73.2 49.846,66.6 K5.5@50.72,66.6
DOOR_TR: P3.11 R31.1 | length 10.9
  Top Layer w0.5: P3.11@20.35,82.7 22.3,84.65 27.15,84.65 28.85,82.95 R31.1@28.85,82.1
GND: C1.2 C2.2 C3.2 C4.2 C5.2 C6.2 C7.2 C8.2 C9.2 C10.2 C11.2 C12.2 C13.2 C14.2 C15.2 C16.1 C17.2 C18.1 C19.2 C20.2 C21.1 C22.1 C23.1 C24.1 C25.1 C26.1 C27.1 C28.1 C29.2 C30.2 C31.2 C32.2 C33.2 C34.2 C35.2 C36.2 C37.2 C38.2 C39.2 C40.2 C41.2 C42.2 C43.2 C44.2 C45.2 P1.2 P3.1 P4.2 P5.7 P5.9 P6.1 P6.8 P7.6 P7.7 P7.8 P8.2 Q1.2 Q2.2 Q3.2 Q5.2 Q6.2 Q7.2 Q8.3 Q10.2 Q12.2 R9.1 R10.1 R11.1 R19.1 R20.1 R21.1 R25.1 R37.1 R41.1 R54.2 R55.2 R64.1 R67.1 R69.1 R71.1 U1.3 U1.4 U1.15 U1.17 U1.18 U1.24 U1.27 U1.29 U1.30 U1.31 U1.32 U2.20 U2.22 U2.23 U2.26 U2.28 U2.31 U3.7 U4.7 U5.7 U6.3 U7.12 U7.18 U7.31 U7.47 U7.60 U7.63 U8.5 U8.11 U8.20 U8.24 U8.26 U8.31 U8.32 U8.33 U8.34 U8.35 U8.36 U9.3 U10.2 U10.4 U11.3 U11.5 U12.3 VD1.1 VD1.2 VD2.2 VD9.1 VD9.2 VD10.2 VD11.1 VD11.2 VD12.1 VD12.2 VD13.2 VD14.2 VD15.1 VD15.2 VD16.1 VD16.2 VD17.2 VD18.2 VD19.1 VD19.2 VD20.2 VD21.1 VD21.2 VD22.2 VD23.1 VD23.2 VD24.2 VD25.1 VD25.2 VD26.1 VD26.2 VD28.2 VD31.1 VD31.2 VD32.1 VD32.2 X1.4 X2.4 X3.4 X4.2 | length 154.4
  Top Layer w0.3: VD23.2@13.7,91.9 13.7,90.8 ; VD23.1@15.6,91.9 14.5,90.8 13.7,90.8 ; C15.2@15.8,87.8 15,87.8 14.7,87.5 v1(13.9,87.5) 13.9,88.1 13.4,88.6 13.4,90.5 13.7,90.8 ; VD11.1@32.4,57.1 32.4,57 v1(33.3,56.1) ; VD12.2@46.5,57.1 47.85,57.1 47.95,57.2 C10.2@47.95,57.85 ; 51.3,85.8 51.6,85.5 51.699,85.5 52.024,85.175 ; v1(53.8,82.8) 52.024,84.576 52.024,85.175 ; U12.3@53.9,85.175 52.024,85.175 ; U9.3@60.5,93.175 59.475,93.175 59.3,93 59.3,91.8 59.8,91.3 v1(60,91.3) 60.4,90.9 C35.2@61.9,90.9 ; C25.1@86.05,70.15 U7.63@88.4,70.15 89.85,70.15 90.1,70.4 90.1,71.5 89.95,71.65 U7.60@88.4,71.65 ; 87.7,64 88.2,64.5 C24.1@88.2,65.3 ; U7.47@90.75,79 C26.1@90.75,81.05 ; C21.1@94.1,63.7 94.3,63.7 95.8,62.2 95.8,61.8 ; U7.12@95.75,67.8 95.75,65.25 C23.1@95.9,65.1 95.9,64.2 96.9,63.2 102.3,63.2 v1(104.4,61.1) ; U7.18@99.6,70.15 101.45,70.15 102.1,69.5 102.4,69.5 C27.1@102.6,69.3 ; U7.31@99.6,76.65 102.35,76.65 C28.1@102.6,76.4 103.1,76.4 104.7,78 104.7,78.9
  Top Layer w0.5: v1(36.7,79.3) 36.9,79.3 37.5,78.7 37.628,78.7 37.728,78.6 40,78.6 40.4,79 VD15.1@40.4,79.7 ; VD15.2@38.5,79.7 VD15.1@40.4,79.7 ; VD16.1@40.4,81 VD15.1@40.4,79.7 ; Q6.2@46.275,71.925 46.7,72.35 VD22.2@46.7,73.665 ; VD21.1@48.8,74.3 VD21.2@50.7,74.3 ; C14.2@52.4,77 52.4,76.3 52.6,76.1 v1(54,76.1) ; Q2.2@55.6,38.7 56.4,38.7 v1(57.3,39.6) ; 99.5,33.7 101.4,33.7 v1(101.5,33.6) ; v1(128.6,66.5) 128.6,68.1 ; v1(128.6,71.5) 129,71.1 U1.15@130.05,71.1 ; U1.18@130.05,68.1 128.6,68.1 ; U1.17@130.05,69.1 128.8,69.1 128.6,68.9 128.6,68.1 ; C5.2@130.1,77.2 130.6,77.2 ; v1(130.6,78.4) 130.6,77.2 ; C4.2@131.4,77.2 130.6,77.2 ; v1(132.5,63.7) 133.078,63.7 133.75,64.372 133.75,64.5 133.9,64.65 U1.24@133.9,65.05 ; C6.2@133.2,77.2 133.85,77.2 ; v1(133.9,78.4) 133.9,77.25 133.85,77.2 ; C3.2@134.5,77.2 133.85,77.2
  Top Layer w0.75: Q5.2@32.2,52.9 32.2,53.8 R19.1@32.7,54.3 ; R11.1@40.9,37.5 41.5,38.1 Q3.2@41.5,38.7 ; Q7.2@44.3,52.9 44.3,53.7 R21.1@44.9,54.3 ; Q10.2@46.1,86.9 46.6,86.9 R37.1@47.2,86.3 ; Q12.2@46.1,91.1 46.7,91.1 R41.1@47.3,90.5 ; Q6.2@46.2,72 46.275,71.925 46.975,71.925 R20.1@47.4,71.5 ; C40.2@48.9,94 49.65,94 50.35,94.7 U10.2@51.1,94.7 ; R10.1@55,37.5 55.6,38.1 Q2.2@55.6,38.7 ; R9.1@69.1,37.5 69.7,38.1 Q1.2@69.7,38.7 ; X2.4@106.81,43 106.9,42.91 v1(106.9,39.7)
  Bottom Layer w0.3: U3.7@98.5,26.33 100.47,26.33 v1(100.9,25.9) ; U8.24@135.95,99.9 137.003,99.9 137.303,100.2 138.9,100.2 P8.2@140.2,101.5
  Bottom Layer w0.5: U2.31@120.98,18.56 120.98,20.48 121.5,21 124.7,21 125.9,19.8 125.9,18.4 ; U8.26@135.85,97.4 134.8,97.4 134,98.2 134,99.2 134.7,99.9 U8.24@135.95,99.9
  Bottom Layer w0.75: R64.1@35.8,96.9 35.8,96.05 35.4,95.65 U11.3@35.4,93.95 35.4,91.275 35.7,90.975 38.525,90.975 38.8,91.25 U11.5@38.8,93.95 ; U2.23@137.48,22.16 139.66,22.16 P4.2@140.2,22.7 139.24,23.66 U2.22@137.48,23.66 ; U2.20@137.48,26.66 139.16,26.66 P4.2@140.2,27.7
  other v1: 96.5,18.1 74.4,18.2 107.1,21.6 16,26.6 73.3,29.6 141.8,32.1 105.9,33.3 82.5,34.2 107,36.5 60.9,38.9 88,39 143.9,44.5 89.4,48.5 65.3,50.8 85.9,51 40.4,52.4 53,52.5 80.3,53.1 99.9,53.4 88.6,54 105.8,55.6 114.4,55.7 20.8,56.2 73.8,56.5 133.9,56.9 85,57.5 69.6,61.1 81.3,61.1 143.9,61.2 126.2,61.9 139,62.1 85,62.2 107.2,64 14.9,65.4 116.9,68.4 77.5,68.6 61.7,71.5 49.2,72.2 112,72.4 44.9,74.1 14.9,74.3 105.9,79.6 80.4,81.6 125.7,81.8 135.9,81.9 64.8,82 73.9,82.1 115.5,82.2 87.2,89.1 81.9,89.5 70.1,89.6 97.5,91.6 68.3,93 73.3,94.1 109.5,95.2 102.8,96.5 97.6,97.2 111.3,100.7 92.3,102.6 19.3,104.6 94.6,106.7 110.9,107.1 117.4,107.2 139.3,107.9
GSM_ON/OFF: R51.1 U7.8 | length 75.4
  Top Layer w0.3: v1(93.7,69.8) 93.75,69.75 U7.8@93.75,67.8 ; v1(106.7,23.3) 122,38.6 122,44.5 121.5,45 117.798,45 113.55,49.248 v1(113.55,50.45)
  Bottom Layer w0.3: v1(93.7,69.8) 94.45,70.55 95.111,70.55 95.7,69.961 95.7,62.014 107.264,50.45 v1(113.55,50.45) ; v1(106.7,23.3) 106.7,23.4 R51.1@106.7,24.4
GSM_READY: U2.7 U7.10 | length 51.6
  Top Layer w0.3: U7.10@94.75,67.8 94.75,69.75 v1(94.8,69.8) ; v1(114.4,49.6) 118.4,45.6 127.2,45.6 v1(127.8,45)
  Bottom Layer w0.3: v1(94.8,69.8) 94.8,66.9 95.1,66.6 95.1,61.907 107.407,49.6 v1(114.4,49.6) ; v1(127.8,45) 127.8,43.24 U2.7@127.88,43.16
GSM_RESET: R50.1 U7.9 | length 59.3
  Top Layer w0.3: v1@94.25,66.2 U7.9@94.25,67.8
  Bottom Layer w0.3: v1(94.2,66.1) 94.2,62.1 107.55,48.75 131.23,48.75 134.68,45.3 137.8,45.3 139.1,44 R50.1@139.1,42.7
GSM_RING: U2.45 U7.11 | length 41.3
  Top Layer w0.3: U7.11@95.25,67.8 95.25,66.05 95.15,65.95 95.15,64.05 96.654,62.546 101.654,62.546 107.8,56.4 107.8,45.095 108.5,44.395 108.5,40.4 v1(110.9,38)
  Bottom Layer w0.3: v1(110.9,38) 112.82,38 U2.45@112.88,38.06
HOOD_TR: P3.9 R28.1 | length 11.4
  Top Layer w0.5: P3.9@20.35,78.5 22.45,80.6 27,80.6 28.75,78.85 R28.1@28.75,77.4
IGN1: K1.3 P2.6 | length 64.3
  Top Layer w3.5: K1.3@61.175,23.33 K1.3@68.675,23.33
  Bottom Layer w3: P2.6@25.85,45 26.5,44.35 27.32,44.35 38.97,32.7 63.2,32.7 64.8,31.1 64.8,23.83 65.3,23.33
  Bottom Layer w3.5: K1.3@61.175,23.33 65.3,23.33
IGN2: K2.3 P2.4 | length 44.1
  Top Layer w3: P2.4@25.85,40.8 26.5,40.15 27.32,40.15 34.97,32.5 48.6,32.5 51,30.1 51,23.93 50.4,23.33
  Top Layer w3.5: K2.3@47.078,23.33 50.4,23.33 K2.3@54.578,23.33
IN+12V: K1.5 K2.5 K3.5 P2.1 VD8.1 | length 99.3
  Top Layer w0.75: v1(18.9,21.9) VD8.1@18.9,22.965
  Top Layer w5: K3.5@33.108,18.29 K3.5@40.608,18.29 K2.5@47.078,18.29 K2.5@54.578,18.29 K1.5@61.175,18.29 K1.5@68.675,18.29
  Bottom Layer w0.75: v1(18.9,21.9) 19.6,21.9
  Bottom Layer w5: P2.1@20.35,36.25 20.35,34.85 21.3,33.9 21.3,23.6 26.71,18.19 K3.5@32.408,18.19 ; K3.5@33.108,18.29 K3.5@40.608,18.29 K2.5@47.078,18.29 K2.5@54.578,18.29 K1.5@61.175,18.29 K1.5@68.675,18.29
LIGHTS: P3.15 Q11.4 | length 13.8
  Top Layer w0.8: P3.15@20.35,91.1 22.45,93.2 30.7,93.2 Q11.4@32.5,95
M_LOCK: R15.2 U7.54 | length 40.3
  Top Layer w0.3: R15.2@50,70.075 54.575,74.65 U7.54@88.4,74.65
MOTOR_CTRL: P3.3 R23.1 | length 13.2
  Top Layer w0.5: P3.3@20.35,65.9 23.2,63.05 23.2,61.2 24.9,59.5 26.85,59.5 R23.1@28.95,61.6
MOTOR_LOCK: P3.7 Q4.4 | length 13.5
  Top Layer w0.8: P3.7@20.35,74.3 22.88,74.3 24.98,72.2 32.8,72.2 Q4.4@32.9,72.3
NetC7_1: C7.1 R5.2 U7.28 VD1.3 | length 71.3
  Top Layer w0.3: VD1.3@68.75,32.25 69.35,32.25 89.1,52 92.6,52 v1(92.8,52.2) ; v1(96.2,56) v1(100,59.8) ; U7.28@99.6,75.15 100.95,75.15 101.6,74.5 v1(105.9,74.5)
  Top Layer w0.75: C7.1@66.1,34 66.1,32.55 R5.2@65.85,32.3 65.9,32.25 VD1.3@68.75,32.25
  Bottom Layer w0.3: v1(92.8,52.2) 96.2,55.6 v1(96.2,56) ; v1(100,59.8) 105.9,65.7 v1(105.9,74.5)
NetC8_1: C8.1 R18.2 U7.58 VD9.3 | length 77.6
  Top Layer w0.3: C8.1@23.1,53.7 25.864,53.7 27.364,55.2 43.465,55.2 44.065,55.8 52.3,55.8 70.6,74.1 85.661,74.1 87.111,72.65 U7.58@88.4,72.65
  Top Layer w0.75: R18.2@22.75,51.8 23.1,52.15 C8.1@23.1,53.7
  Top Layer w1: R18.2@23.1,52.15 VD9.3@24.35,52.15
NetC9_1: C9.1 R24.2 U7.35 VD11.3 | length 82.4
  Top Layer w0.3: R24.2@34.85,61.6 36.7,61.6 v1(37.8,62.7) ; v1(53.2,58.2) 60.6,65.6 v1(60.7,65.5) ; v1(69.7,65.7) 85.2,65.7 v1(87.9,68.4) ; v1(95.5,71.3) 95.5,74.793 96.75,76.043 U7.35@96.75,79
  Top Layer w0.75: VD11.3@33.35,59.65 34.6,59.65 ; R24.2@34.65,61.6 34.65,59.7 34.6,59.65 ; C9.1@35.8,59.2 35.35,59.65 34.6,59.65
  Bottom Layer w0.3: v1(37.8,62.7) 44,62.7 49.8,56.9 52,56.9 53.2,58.1 v1(53.2,58.2) ; v1(60.7,65.5) 69.5,65.5 v1(69.7,65.7) ; v1(87.9,68.4) 89.339,68.4 91.989,71.05 95.25,71.05 v1(95.5,71.3)
NetC10_1: C10.1 R26.2 U7.36 VD12.3 | length 64.8
  Top Layer w0.3: R26.2@46.6,61.55 55.35,61.55 60.4,66.6 v1(60.5,66.6) ; v1@70.4,66.7 v1(70.5,66.7) v1(85,66.7) ; v1(94.5,71.9) 94.5,74.5 96.25,76.25 U7.36@96.25,79
  Top Layer w0.75: VD12.3@45.55,59.65 46.8,59.65 ; R26.2@46.6,61.55 46.6,59.85 46.8,59.65 ; C10.1@47.95,59.25 47.55,59.65 46.8,59.65
  Bottom Layer w0.3: v1(60.5,66.6) 70.4,66.6 v1(70.5,66.7) ; v1(85,66.7) 85,66.9 85.339,66.9 89.989,71.55 94.15,71.55 v1(94.5,71.9)
NetC11_1: C11.1 R29.2 U7.53 VD15.3 | length 52.6
  Top Layer w0.3: C11.1@41.9,77.1 42.3,77.1 44.15,75.25 51.386,75.25 51.486,75.15 U7.53@88.4,75.15
  Top Layer w0.75: R29.2@36.75,77.4 37,77.15 VD15.3@39.45,77.15 39.5,77.1 C11.1@41.9,77.1
NetC12_1: C12.1 R30.2 U7.52 VD16.3 | length 54.7
  Top Layer w0.3: C12.1@43.6,83.6 49.8,83.6 54.8,78.6 54.8,76.9 56.05,75.65 U7.52@88.4,75.65
  Top Layer w0.75: R30.2@38.65,81.9 40.3,83.55 VD16.3@41.35,83.55 43.55,83.55 C12.1@43.6,83.6
NetC13_1: C13.1 R32.2 U7.51 VD19.3 | length 110.7
  Top Layer w0.3: C13.1@17.1,76.6 17.1,61.7 20.3,58.5 v1(28.2,58.5) ; v1(57.6,76.7) 58.15,76.15 U7.51@88.4,76.15
  Top Layer w0.75: VD19.3@14.65,78.15 17,78.15 R32.2@17.1,78.25 ; C13.1@17.1,76.6 R32.2@17.1,78.25 ; R32.2@17.3,78.45 R32.2@17.1,78.25
  Bottom Layer w0.3: v1(28.2,58.5) 35.8,58.5 38,56.3 52.9,56.3 54.9,58.3 54.9,74 v1(57.6,76.7)
NetC14_1: C14.1 R43.2 U7.39 VD21.3 | length 52.1
  Top Layer w0.3: C14.1@52.4,78.4 53.7,78.4 v1(53.7,78.3) ; v1(56.2,77.1) 56.7,77.1 57.2,77.6 57.902,77.6 58.502,77 v1(85.5,77) ; v1(93.7,74.7) 94.6,75.6 94.6,77.743 94.75,77.893 U7.39@94.75,79
  Top Layer w0.75: VD21.3@49.75,76.85 50.55,77.65 R43.2@50.55,78.4 ; R43.2@50.35,78.6 R43.2@50.55,78.4 ; C14.1@52.4,78.4 R43.2@50.55,78.4
  Bottom Layer w0.3: v1(53.7,78.3) 54.9,77.1 v1(56.2,77.1) ; v1(85.5,77) 87.4,75.1 93.3,75.1 v1(93.7,74.7)
NetC15_1: C15.1 R44.2 U7.40 VD23.3 | length 125.6
  Top Layer w0.3: v1(90.5,92.7) 90.5,91.5 94,88 v1(94,85.8) ; U7.40@94.25,79 94.25,80.95 94.6,81.3 v1(94.6,81.2)
  Top Layer w0.5: v1(17.2,86.8) C15.1@17.2,87.8
  Top Layer w0.75: VD23.3@14.65,89.35 14.95,89.65 R44.2@17.3,89.65 17.3,87.9 C15.1@17.2,87.8
  Bottom Layer w0.3: v1(94,85.8) 94,81.8 v1(94.6,81.2)
  Bottom Layer w0.5: v1(17.2,86.8) 17.2,95.6 22,100.4 22,108.4 23.8,110.2 67.4,110.2 74.4,103.2 74.4,96.4 78.1,92.7 90.3,92.7 v1@90.5,92.5
NetC16_2: C16.2 U2.8 X1.1 X2.1 X3.1 | length 76.2
  Top Layer w0.5: X3.1@87.61,17.8 87.61,16.59 88.2,16 106.75,16 ; v1(108.3,17.8) X2.1@106.81,17.8 106.75,17.74 106.75,16 ; v1(129.4,45) 129.4,23.8 126.01,20.41 X1.1@126.01,17.8 126.01,16.71 125.3,16 106.75,16
  Bottom Layer w0.5: v1(108.3,17.8) C16.2@109.5,17.8 ; U2.8@129.38,43.16 129.38,44.98 v1(129.4,45)
NetC19_1: C19.1 U7.5 Y1.3 | length 9.5
  Top Layer w0.3: C19.1@90,59.4 90,60.75 Y1.3@89.9,60.85 89.995,60.85 91,61.855 91,62.645 91.855,63.5 91.9,63.5 91.9,65.9 92.25,66.25 U7.5@92.25,67.8